# Altium PCB PCB1_Young.PcbDoc
Units mil, origin at the board's own origin, x right, y up, seen from the top; angles counter-clockwise.
Board outline 2096 x 2836 mil, 2 copper layers (Top Layer, Bottom Layer); 17 components, 27 nets, 106 pads, 0 vias.
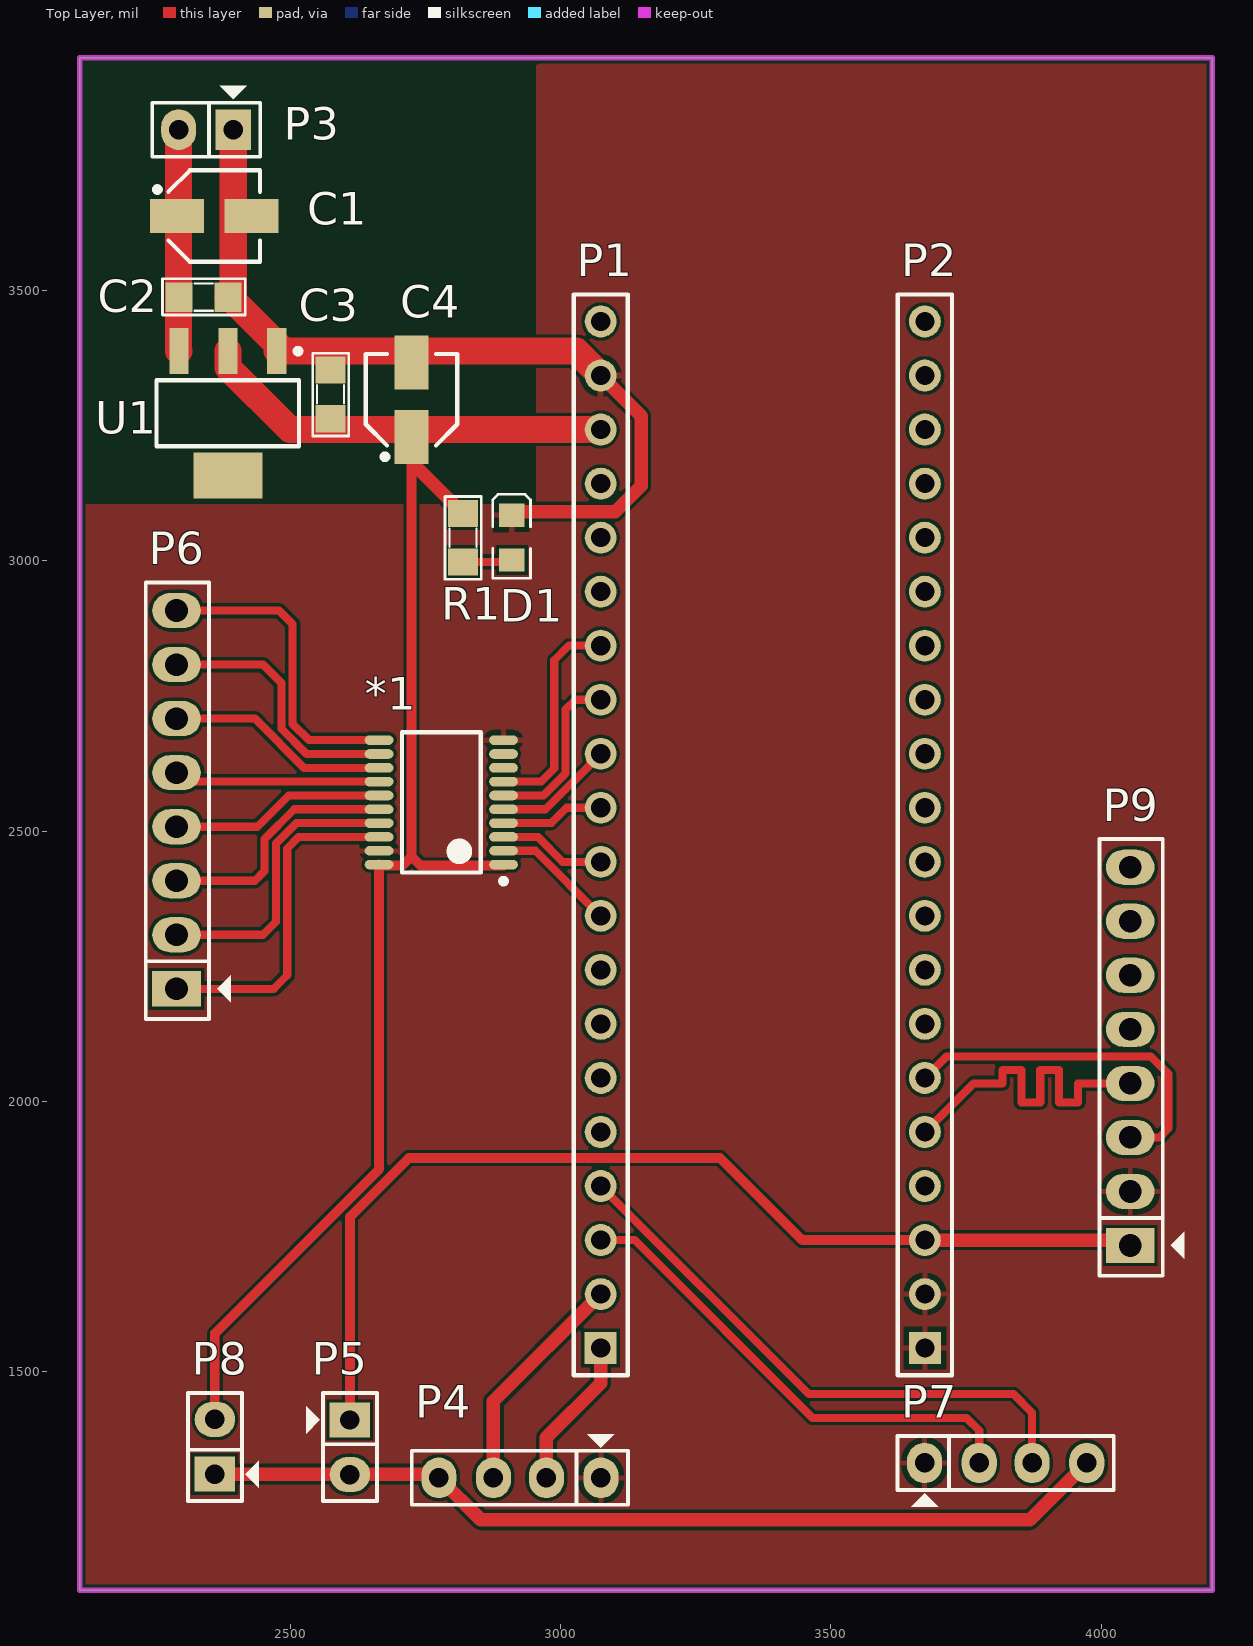
[diagram p0: Top Layer view]
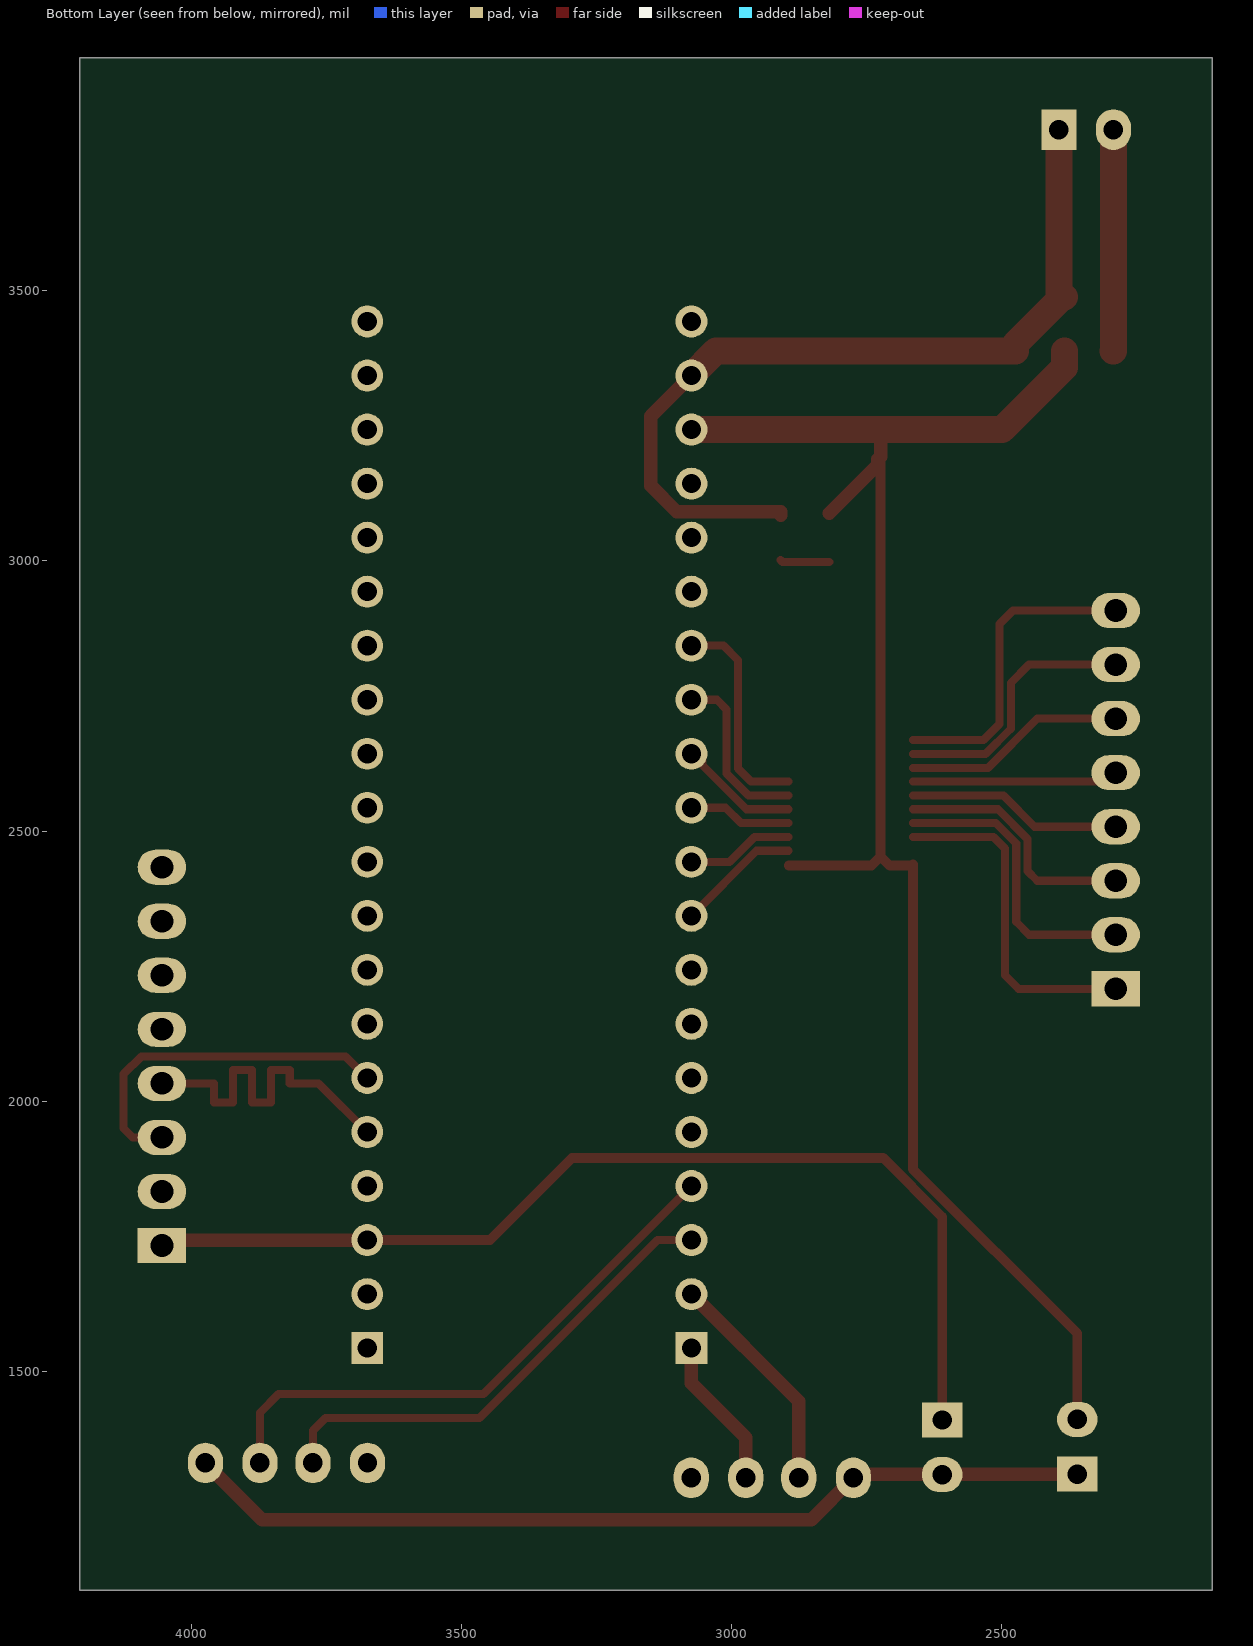
[diagram p1: Bottom Layer view, seen from below]
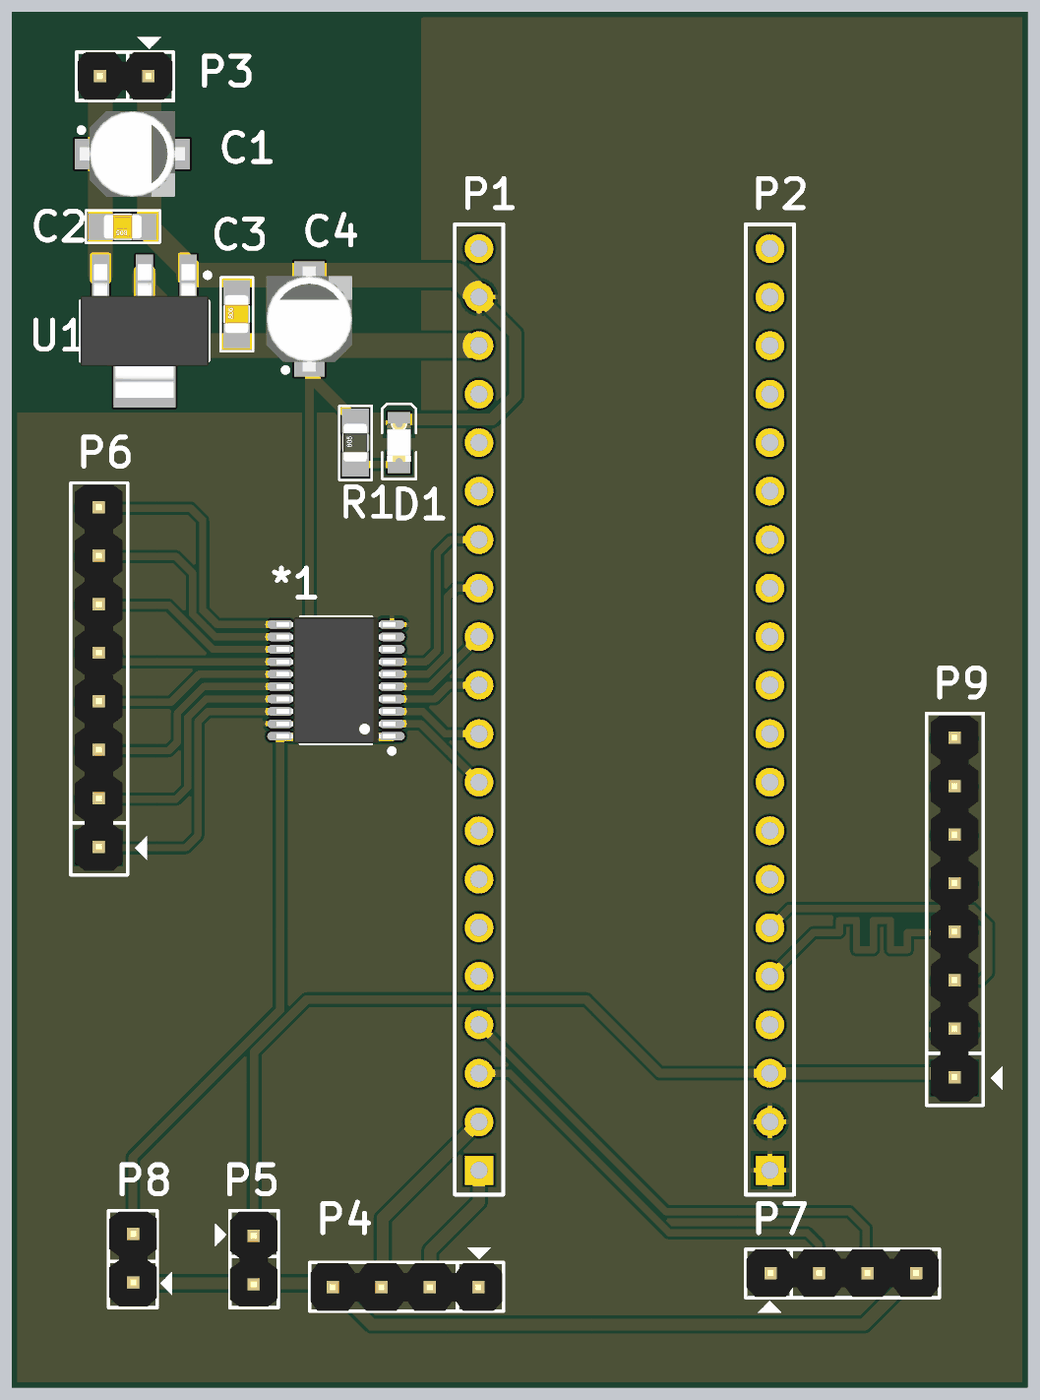
[diagram p2: 3D render of the assembled board from above, using the file's embedded part models]

## Layer stack, top to bottom
Top Solder: solder mask 0.4, Solder Resist, Dk 3.5
Top Layer: signal copper 1.4
Dielectric 1: dielectric 12.6, FR-4, Dk 4.8
Bottom Layer: signal copper 1.4
Bottom Solder: solder mask 0.4, Solder Resist, Dk 3.5

## Board outline
2110,1095 2110,3931 4206,3931 4206,1095

## Design rules (kind name [scope] priority, off if disabled: settings)
Clearance [All] p1: gap=6 ignorepadtopadclearanceinfootprint=FALSE
DiffPairsRouting [All] p1: maxlimit=10 minlimit=10 mostfreqgap=10 toplayer_minwidth=15 toplayer_maxwidth=15 toplayer_prefwidth=15 bottomlayer_minwidth=15 bottomlayer_maxwidth=15 bottomlayer_prefwidth=15 maxuncoupledlength=500
MinimumSolderMaskSliver [All] p1: minsoldermaskwidth=0
PolygonConnect [All] p1: connectstyle=Relief reliefconductorwidth=10 reliefentries=4 polygonreliefangle="90 Angle" airgapwidth=10
RoutingVias [All] p1: holewidth=19.68 width=39.37 viastyle="Through Hole" minholewidth=19.68 minwidth=39.37 maxholewidth=39.37 maxwidth=78.74
SilkToSilkClearance [All] p1: silktosilkclearance=0
SilkToSolderMaskClearance [IsPad] p1: minsilkscreentomaskgap=0 clearancetoexposedcopper=TRUE
SolderMaskExpansion [All] p1: expansion=4
Width [All] p1: maxlimit=50 minlimit=10 preferedwidth=25
26 further rules are at their usual default settings.

## Classes and differential pairs
differential pair S: +S_P -S_N

## Components (designator, comment, footprint, x,y, rotation, side; value= is the part's Value field where it differs from the comment)
*1 "74HC245" TSOP65P630X120-20N 2779,2553 r180 top
C1 "Cap Pol SMD" "CAP ALU SIZE B" 2359,3638 r0 top value=220uF
C2 "Cap Non-Pol SMD" CAP-SM-0805 2384,3488 r180 top value=100nF
C3 "Cap Non-Pol SMD" CAP-SM-0805 2574,3263 r90 top value=100nF
C4 "Cap Pol SMD" "CAP ALU SIZE B" 2724,3298 r90 top value=220uF
D1 "LED SMD" LED_0805_Blue 2909,3043 r90 top
P1 "Header 21-40" HDR1X20 3074,1543 r90 top
P2 "Header 1-20" HDR1X20 3674,1543 r90 top
P3 "Header 2" JP2 2394,3798 r180 top
P4 "Header 4" JP4 2974.44,1303 r180 top
P5 "Header 2" JP2 2610,1410 r270 top
P6 "Header 8" JP8 2289,2208 r90 top
P7 "Header 4" JP4 3773.56,1330.5 r0 top
P8 "Header 2" JP2 2360,1310 r90 top
P9 "Header 8" JP8 4054,1733 r90 top
R1 "RESISTOR SMD" RES-SM-0805 2819,2998 r90 top value=220
U1 "AMS1117-5" SOT230P700X180-4N 2384,3273 r270 top

## Footprints (in the part's own frame and the unit in brackets; to place one, negate y for a bottom-side part, rotate by r counter-clockwise, add the part's x,y. Pads: shape width x height; smd on the part's side, far side on the other; paste and mask are expansions set on the pad)
"CAP ALU SIZE B" [mm] "Capacitor, Aluminium Electrolytric, 4.3mm L X 4.3mm W X 5.4mm H, IPC Medium Density"
  rect 2.55x1.6 smd: 1(-1.75,0) 2(1.75,0)
  silkscreen extent -2.8,-2.15 2.15,2.15, body extent -2.75,-2.25 2.75,2.25, height 5.7
CAP-SM-0805 [mil]
  rect 50x55 smd: 1(0,0) 2(90,0)
  silkscreen extent -32,-34 121,33, body extent 6,-25 84,25, height 31
HDR1X20 [mm] "Connector; Header; 20 Position"
  rect 1.5x1.5 hole 0.9: 1(0,0)
  round 1.5 hole 0.9: 2(2.54,0) 3(5.08,0) 4(7.62,0) 5(10.16,0) 6(12.7,0) 7(15.24,0) 8(17.78,0) 9(20.32,0) 10(22.86,0) 11(25.4,0) 12(27.94,0) 13(30.48,0) 14(33.02,0) 15(35.56,0) 16(38.1,0) 17(40.64,0) 18(43.18,0) 19(45.72,0) 20(48.26,0)
  silkscreen extent -1.27,-1.27 49.53,1.27
JP2 [mil]
  rect 65x75 hole 36: 1(0,0)
  oval 65x75 hole 36: 2(101,0)
  silkscreen extent -50,-81 150,50, body extent -48,-50 148,48, height 323
JP4 [mil] "Jumper 4"
  oval 65x75 hole 36: 1(-100,0) 2(1,0) 3(99,0) 4(200,0)
  silkscreen extent -150,-81 250,50, body extent -148,-48 248,50, height 323
JP8 [mil] "JP8"
  rect 65x90 hole 42: 1(0,0)
  oval 65x90 hole 42: 2(100,0) 3(200,0) 4(300,0) 5(400,0) 6(500,0) 7(600,0) 8(700,0)
  silkscreen extent -56,-100 752,57, body extent -48,-50 748,48, height 323
LED_0805_Blue [mm] "Chip LED, 2-Leads, Body 2.0x1.3mm, IPC Medium Density"
  rect 1.1x1.2 smd: 1(-1.05,0) 2(1.05,0)
  silkscreen extent -1.91,-0.89 2.03,0.89, body extent -1,-0.63 1,0.62, height 0.68
RES-SM-0805 [mil]
  rect 50x55 smd: 1(0,0) 2(90,0)
  silkscreen extent -32,-34 121,33, body extent 6,-25 84,25, height 31
SOT230P700X180-4N [mm] "SOT223, 4-Leads, Body 6.50x7.00mm (avg), Pitch 2.30mm, IPC Medium Density"
  rect 2.15x0.9 smd: 1(-2.925,2.3) 2(-2.925,0) 3(-2.925,-2.3)
  rect 2.15x3.25 smd: 4(2.925,0)
  silkscreen extent -3.05,-3.35 1.55,3.43, body extent -3.5,-3.35 3.5,3.35, height 1.8
TSOP65P630X120-20N [mm] "TSOP, 20-Leads, Body 6.50x4.40mm, Pitch 0.65mm, IPC Medium Density"
  oval 1.35x0.45 smd: 1(-2.925,2.925) 2(-2.925,2.275) 3(-2.925,1.625) 4(-2.925,0.975) 5(-2.925,0.325) 6(-2.925,-0.325) 7(-2.925,-0.975) 8(-2.925,-1.625) 9(-2.925,-2.275) 10(-2.925,-2.925) 11(2.925,-2.925) 12(2.925,-2.275) 13(2.925,-1.625) 14(2.925,-0.975) 15(2.925,-0.325) 16(2.925,0.325) 17(2.925,0.975) 18(2.925,1.625) 19(2.925,2.275) 20(2.925,2.925)
  silkscreen extent -3.05,-3.3 1.85,3.82, body extent -3.15,-3.3 3.15,3.3, height 1.2

## Part data
C1 C4: "Polarized Capacitor (Radial)"
C2 C3: "Capacitor"
D1: "LED"
P1 P2: library part "Header 20", "Header, 20-Pin", LatestRevisionDate=17-Jul-2002, LatestRevisionNote="Re-released for DXP Platform.", Publisher="Altium Limited"
P3 P5 P8: "Header, 2-Pin", LatestRevisionDate=17-Jul-2002, LatestRevisionNote="Re-released for DXP Platform.", Publisher="Altium Limited"
P4 P7: "Header, 4-Pin", LatestRevisionDate=17-Jul-2002, LatestRevisionNote="Re-released for DXP Platform.", Publisher="Altium Limited"
P6 P9: "Header, 8-Pin", LatestRevisionDate=17-Jul-2002, LatestRevisionNote="Re-released for DXP Platform.", Publisher="Altium Limited"
R1: "Resistor"
U1: library part AMS1117-3.3, Package=None, Availability=Unavailable, MF=NEC, MP=AMS1117-3.3, Price=None, SnapEDA_Link=https://www.snapeda.com/parts/AMS1117-3.3/NEC/view-part/?ref=snap

## Nets (pads, with @x,y where several pads share a name; then routed paths per layer and width w, separated by ;. In a path a pad name is that pad's centre, name@x,y a point inside that pad or via, vN(x,y) a via of type N, cw(c..) or ccw(c..) an arc to the next point about the centre after c; other vN are vias at no path point)
1_IN1: *1.2 P1.9 | length 229.7
  Top Layer w15: *1.2 2953.57,2463.43 P1.9
1_IN2: *1.3 P1.10 | length 198.9
  Top Layer w15: *1.3 2957.67,2489.02 3003.7,2443 P1.10
1_IN3: *1.4 P1.11 | length 191.6
  Top Layer w15: *1.4 2982.61,2514.61 3011,2543 P1.11
1_IN4: *1.5 P1.12 | length 234.7
  Top Layer w15: *1.5 2972.2,2540.2 3054,2622 3054,2643 P1.12
3.3: P2.3 P5.1 P9.1 | length 1932.3
  Top Layer w18: P5.1 2610,1786.06 2718.94,1895 3295,1895 3447,1743 P2.3
  Top Layer w25: P2.3 4044,1743 P9.1
5V: *1.1 *1.20 C3.1 C4.1 P1.18 P8.2 R1.2 U1.2 | length 3075.3
  Top Layer w18: P8.2 2360,1570 2663.84,1873.84 *1.20@2663.84,2436.07 ; *1.20 *1.20@2663.84,2436.07 ; C4.1@2724,3183 2724,2453 ; *1.1@2894.16,2436.07 2740.93,2436.07 2724,2453 ; *1.20@2663.84,2436.07 2707.07,2436.07 2724,2453
  Top Layer w25: C4.1 2724,3193 2729,3188 2729,3178 R1.2
  Top Layer w50: U1.2 2384,3358 2499,3243 P1.18
CA1: P1.1 P4.2 | length 281.7
  Top Layer w25: P4.2 2973.44,1377.44 3074,1478 P1.1
CA2: P1.3 P7.2 | length 906.5
  Top Layer w15: P1.3 3137,1743 3466,1414 3751,1414 3774.56,1390.44 P7.2
CB1: P1.2 P4.3 | length 422.2
  Top Layer w25: P4.3 2875.44,1444.44 P1.2
CB2: P1.4 P7.3 | length 1065.3
  Top Layer w15: P1.4 3459,1458 3838,1458 3872.56,1423.44 P7.3
GND: *1.10 *1.19 C1.2 C2.1 C3.2 C4.2 D1.2 P1.19 P2.1 P2.2 P3.1 P4.1 P7.1 P9.2 U1.1 | length 1573.6
  Top Layer w25: D1.2 2909,3091.03 3101.03,3091.03 3149,3139 3149,3268 P1.19
  Top Layer w50: P3.1 2394,3498 C2.1 2388.04,3488 2474.55,3401.49 U1.1 3028.84,3388.16 P1.19
Net*1_11: *1.11 P6.8 | length 582.6
  Top Layer w15: P6.8 2479,2908 2504,2883 2504,2698 2533.84,2668.16 *1.11
Net*1_12: *1.12 P6.7 | length 493
  Top Layer w15: P6.7 2449,2808 2483,2774 2483,2689.3 2529.73,2642.57 *1.12
Net*1_13: *1.13 P6.6 | length 412.5
  Top Layer w15: P6.6 2434,2708 2525.02,2616.98 *1.13
Net*1_14: *1.14 P6.5 | length 381.7
  Top Layer w15: P6.5 2305.61,2591.39 *1.14
Net*1_15: *1.15 P6.4 | length 398.8
  Top Layer w15: P6.4 2439,2508 2496.8,2565.8 *1.15
Net*1_16: *1.16 P6.3 | length 464.4
  Top Layer w15: P6.3 2434,2408 2452,2426 2452,2485.4 2506.81,2540.2 *1.16
Net*1_17: *1.17 P6.2 | length 545.2
  Top Layer w15: P6.2 2449,2308 2473,2332 2473,2476.7 2510.92,2514.61 *1.17
Net*1_18: *1.18 P6.1 | length 628.9
  Top Layer w15: P6.1 2469,2208 2494,2233 2494,2468 2515.02,2489.02 *1.18
NetC1_1: C1.1 C2.2 P3.2 U1.3 | length 410
  Top Layer w50: P3.2 2293,3388.61 U1.3
NetD1_1: D1.1 R1.1 | length 91.5
  Top Layer w15: R1.1 2905.34,2998 D1.1
PWM1: *1.6 P1.13 | length 322.5
  Top Layer w15: *1.6 2968.1,2565.8 3009,2606.7 3009,2725 3027,2743 P1.13
PWM2: *1.7 P1.14 | length 401.6
  Top Layer w15: *1.7 2963.99,2591.39 2988,2615.4 2988,2816 3015,2843 P1.14
S_N: P2.5 P9.4 | length 659.3
  Top Layer w15: P2.5 3764,2033 3800,2033 3817.5,2033 3817.5,2058 3852.5,2058 3852.5,2033 3852.5,1997.5 3887.5,1997.5 3887.5,2033 3887.5,2058 3922.5,2058 3922.5,2033 3922.5,1997.5 3957.5,1997.5 3957.5,2033 3975,2033 P9.4
S_P: P2.6 P9.3 | length 659.3
  Top Layer w15: P2.6 3714,2083 3807.14,2083 3932.86,2083 4092,2083 4125,2050 4125,1950 4108,1933 P9.3
VB: P2.20
VC: P4.4 P5.2 P7.4 P8.1 | length 1692.5
  Top Layer w25: P8.1 2767.44,1310 P4.4 2852.44,1225 3868.06,1225 P7.4
pads on no net: *1.8 *1.9 P1.5 P1.6 P1.7 P1.8 P1.15 P1.16 P1.17 P1.20 P2.4 P2.7 P2.8 P2.9 P2.10 P2.11 P2.12 P2.13 P2.14 P2.15 P2.16 P2.17 P2.18 P2.19 P9.5 P9.6 P9.7 P9.8 U1.4

## Polygon pours and split planes (outlines as drawn)
GND on Top Layer "GND_L01_P002" (solid, remove dead copper, pour order 2): 2110,1095 2110,3931 4206,3931 4206,1095

## Keep-outs
Top Layer:
  the board outline again, w10

## Other copper
Top Layer:
  pour cut-out: 2120,3099
  pour cut-out: 2120,3105 2955,3105 2955,3917.51 2121.43,3917.51 2120,3916.08